# Altium PCB AmpPCB.PcbDoc
Units mil, origin at the board's own origin, x right, y up, seen from the top; angles counter-clockwise.
Board outline 2200 x 1925 mil, 4 copper layers (Top Layer, Int1 (GND), Int2 (PWR), Bottom Layer), stack 53.912 mil thick; 31 components, 20 nets, 89 pads, 26 vias.
Unrouted connection lines stored in the file: 1.
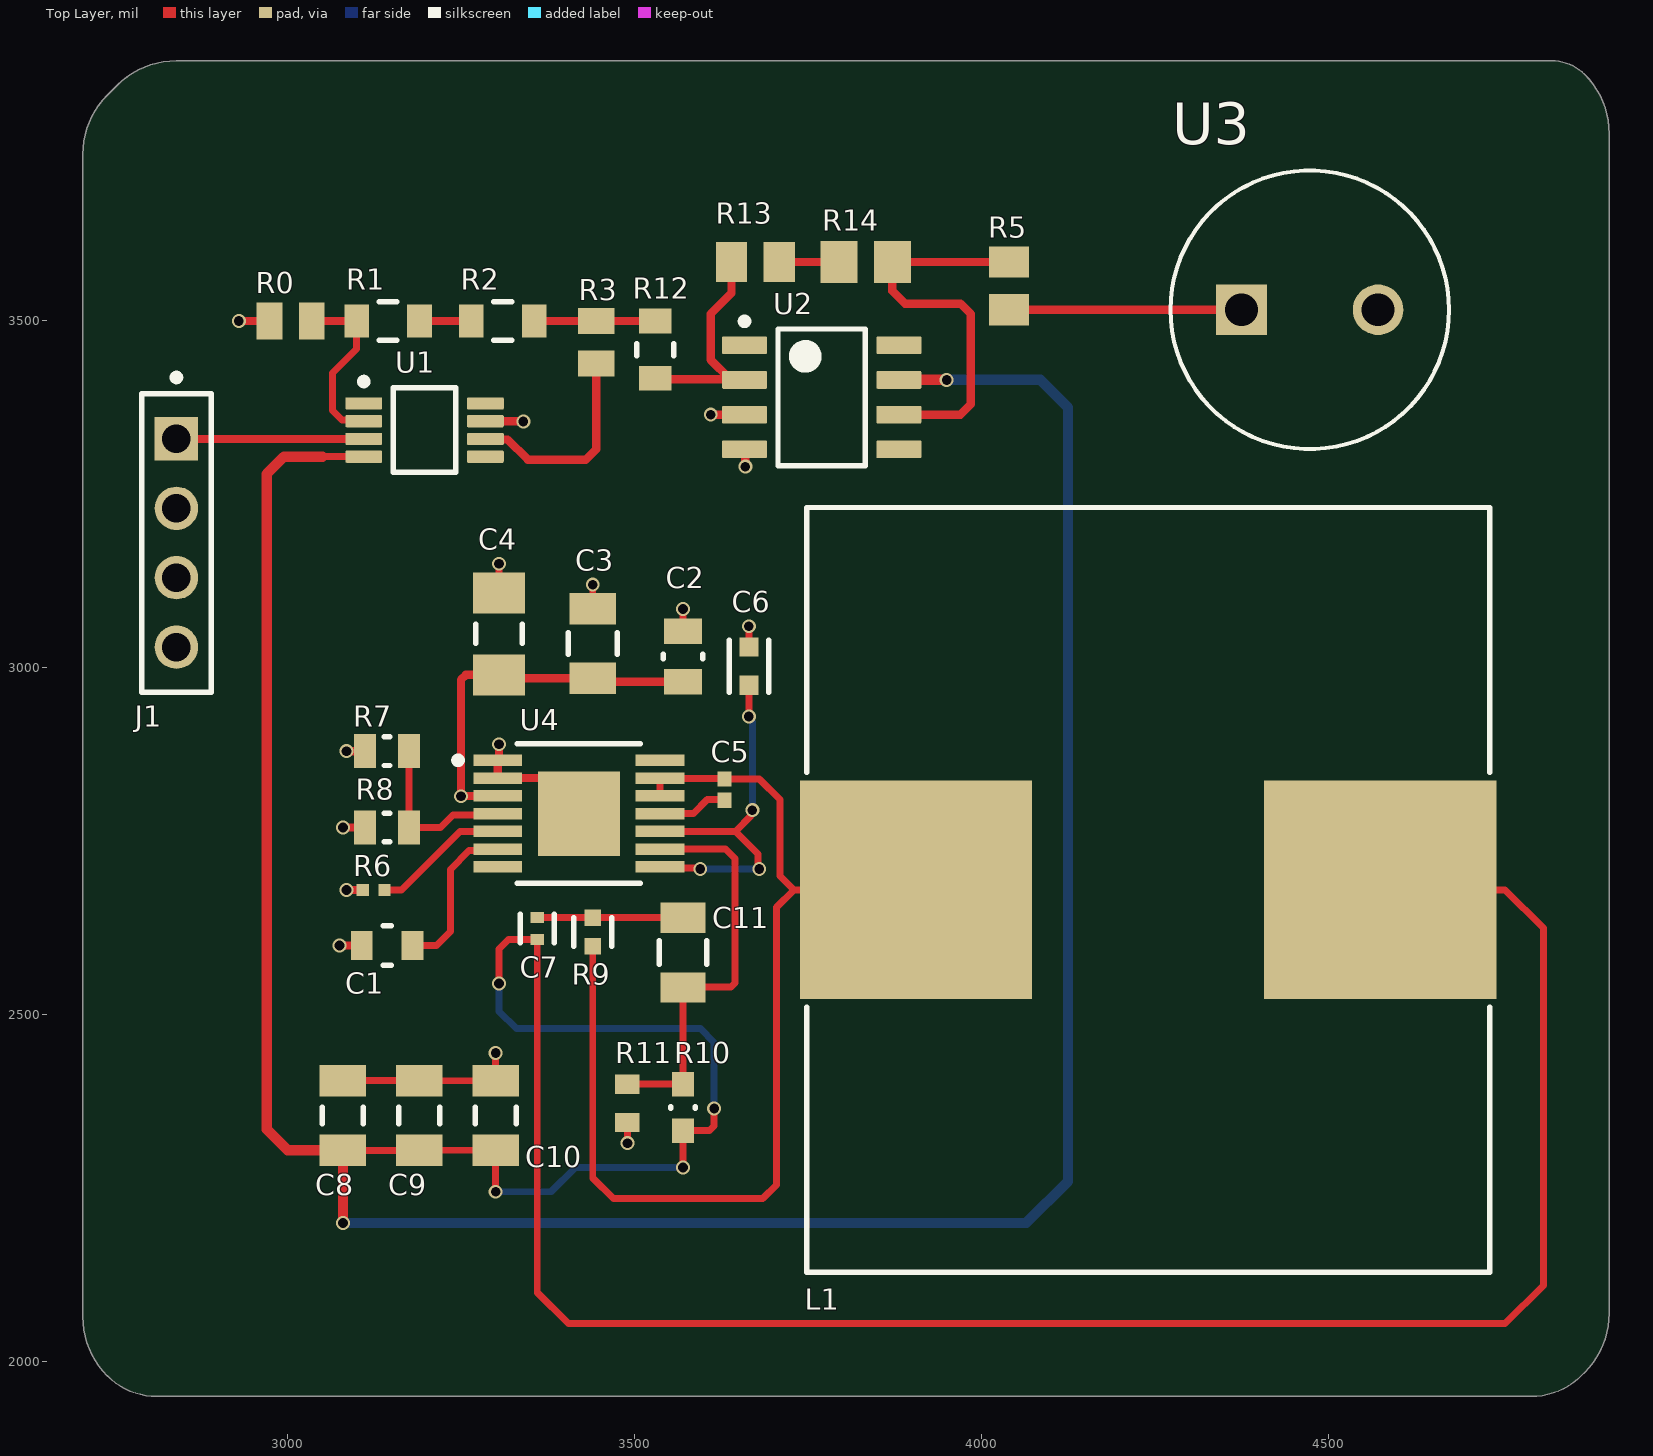
[diagram p0: Top Layer view]
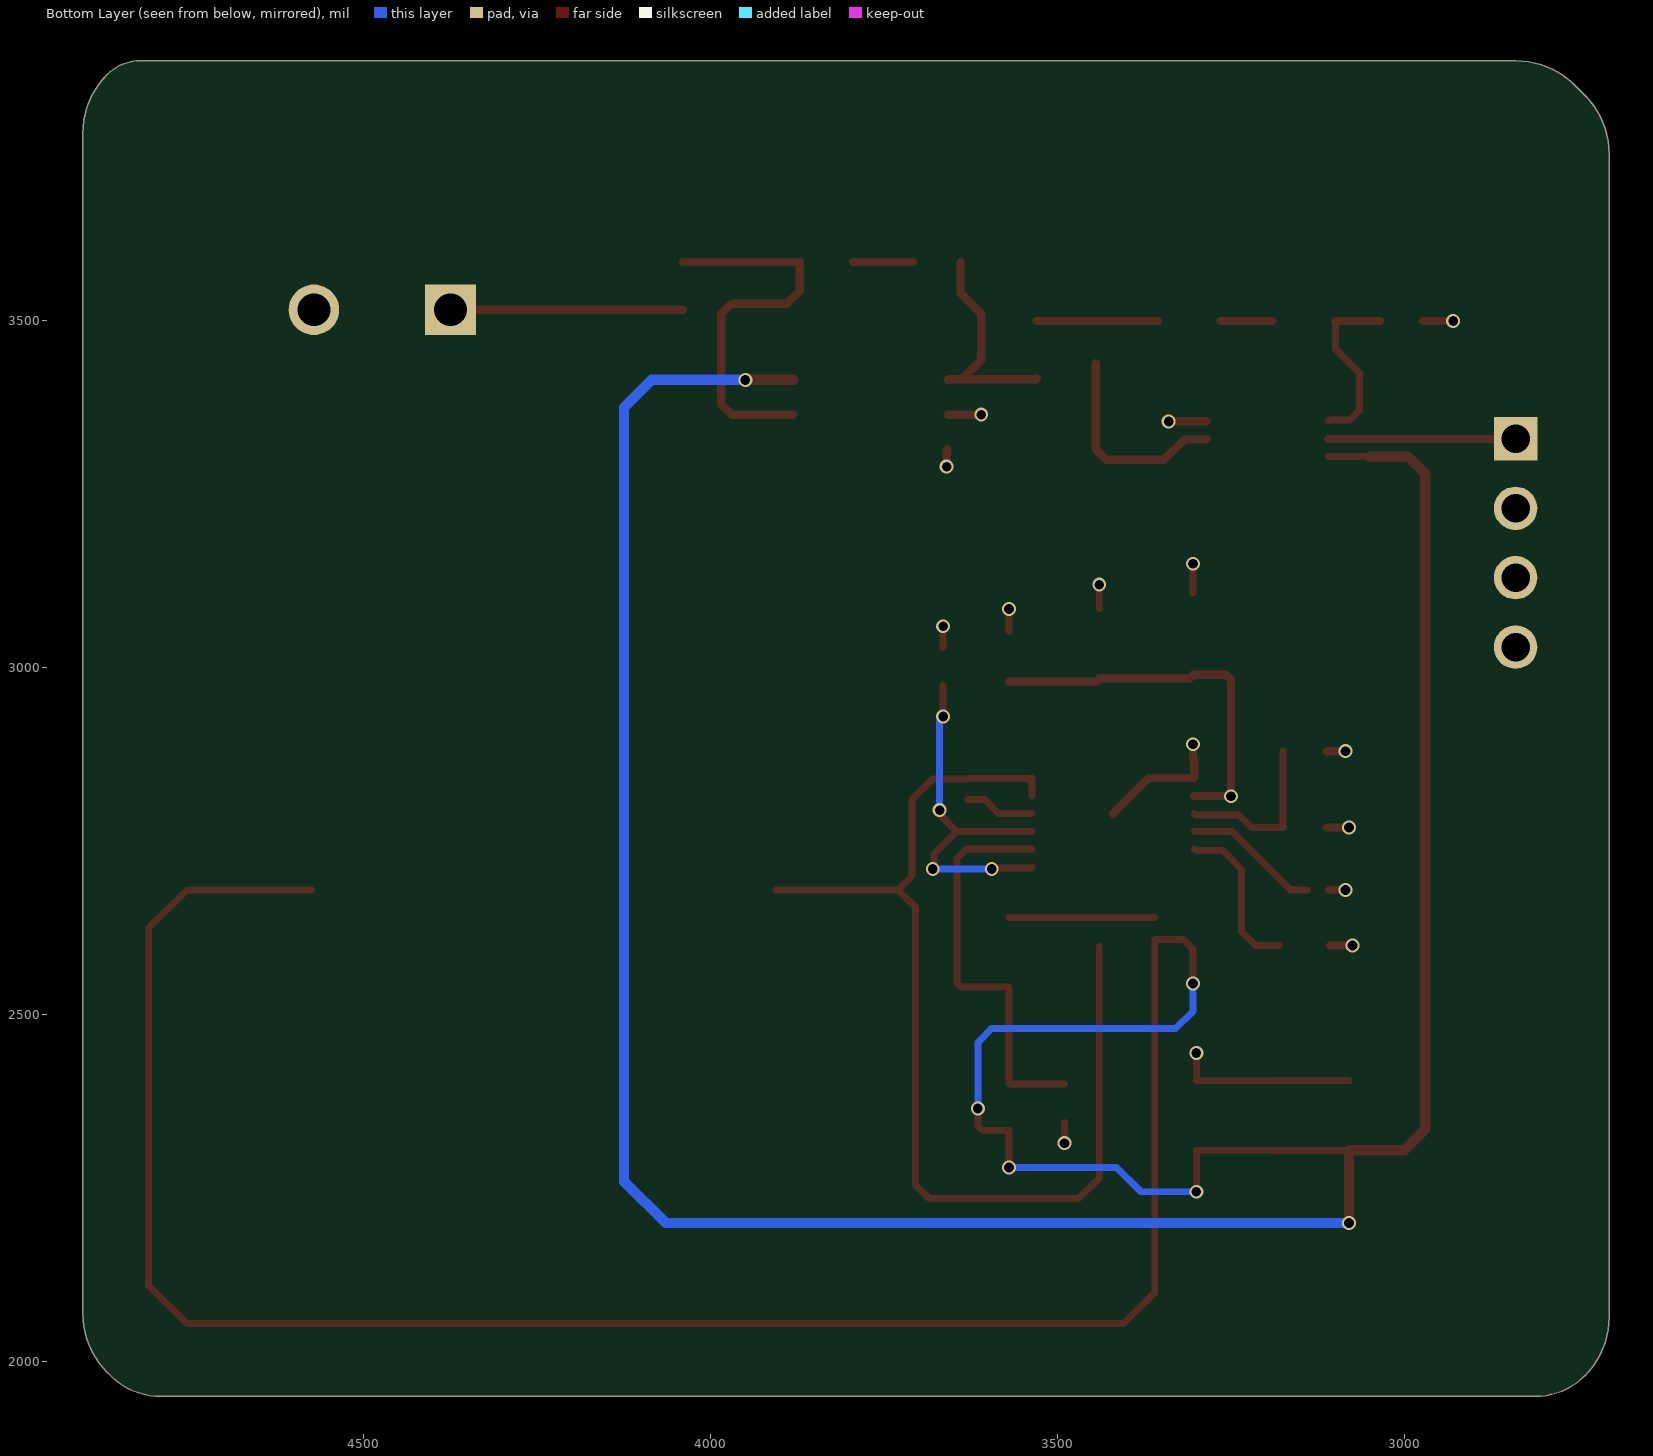
[diagram p1: Bottom Layer view, seen from below]
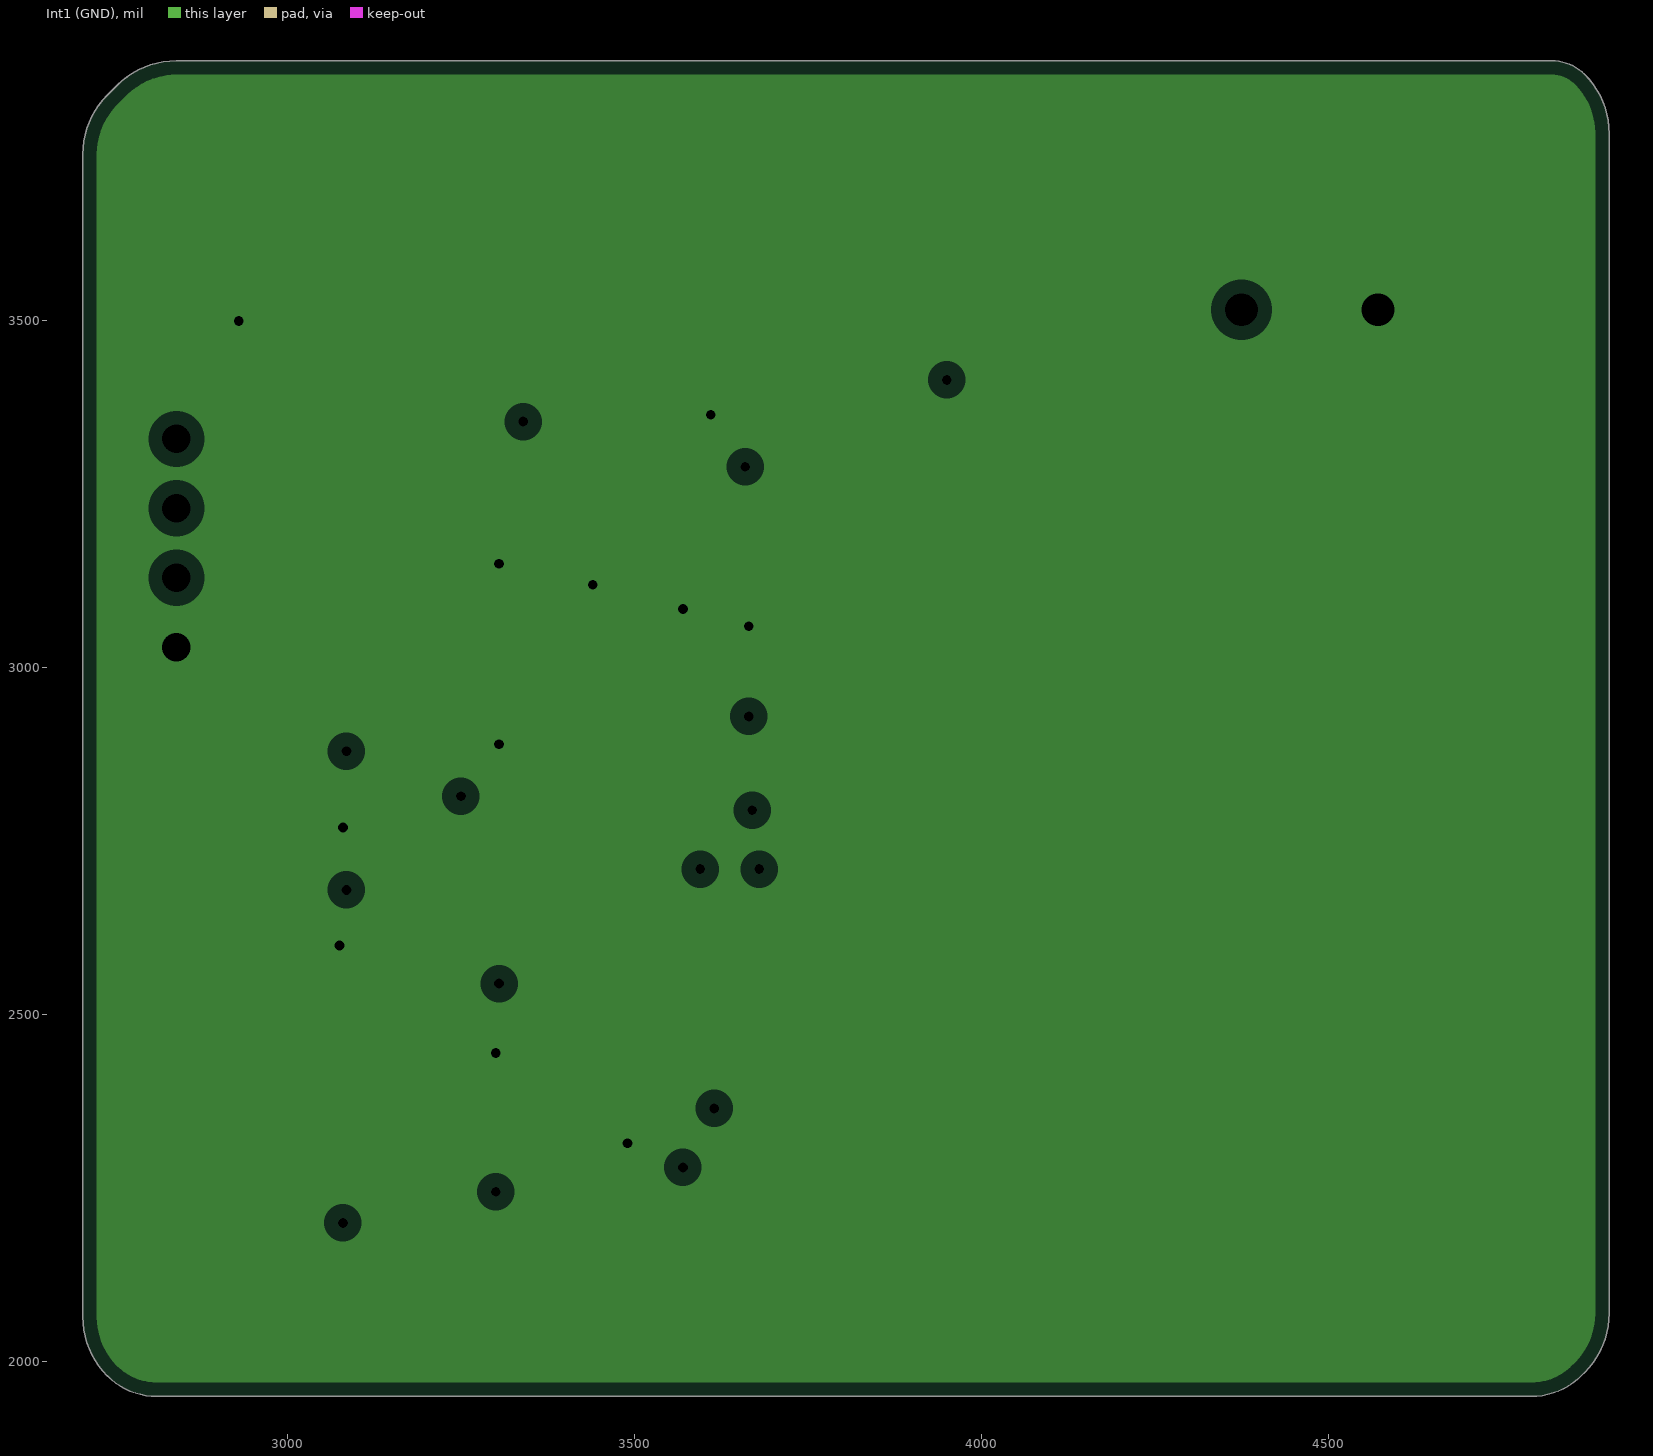
[diagram p2: Int1 (GND), clearances drawn from the general rule]
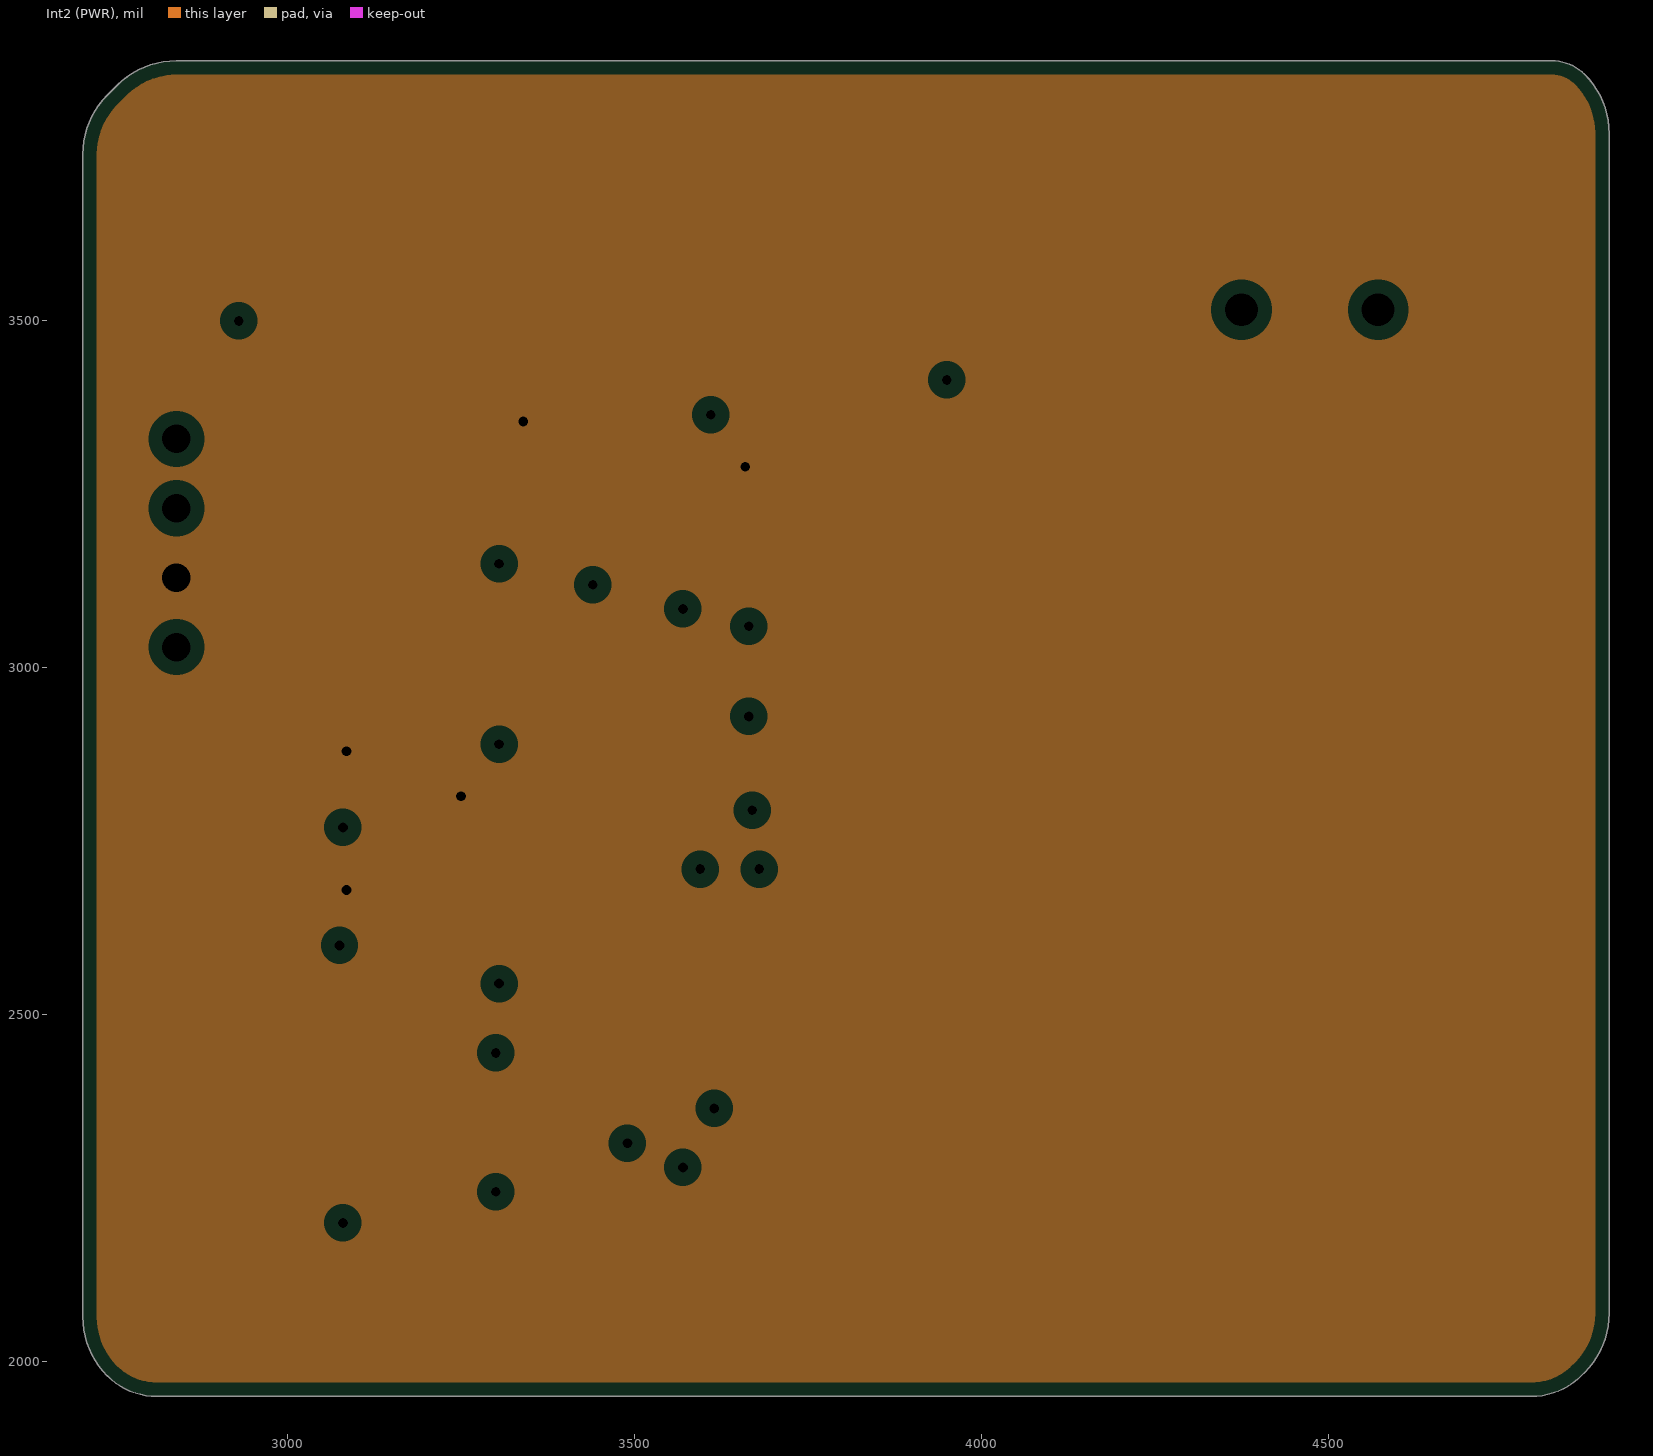
[diagram p3: Int2 (PWR), clearances drawn from the general rule]
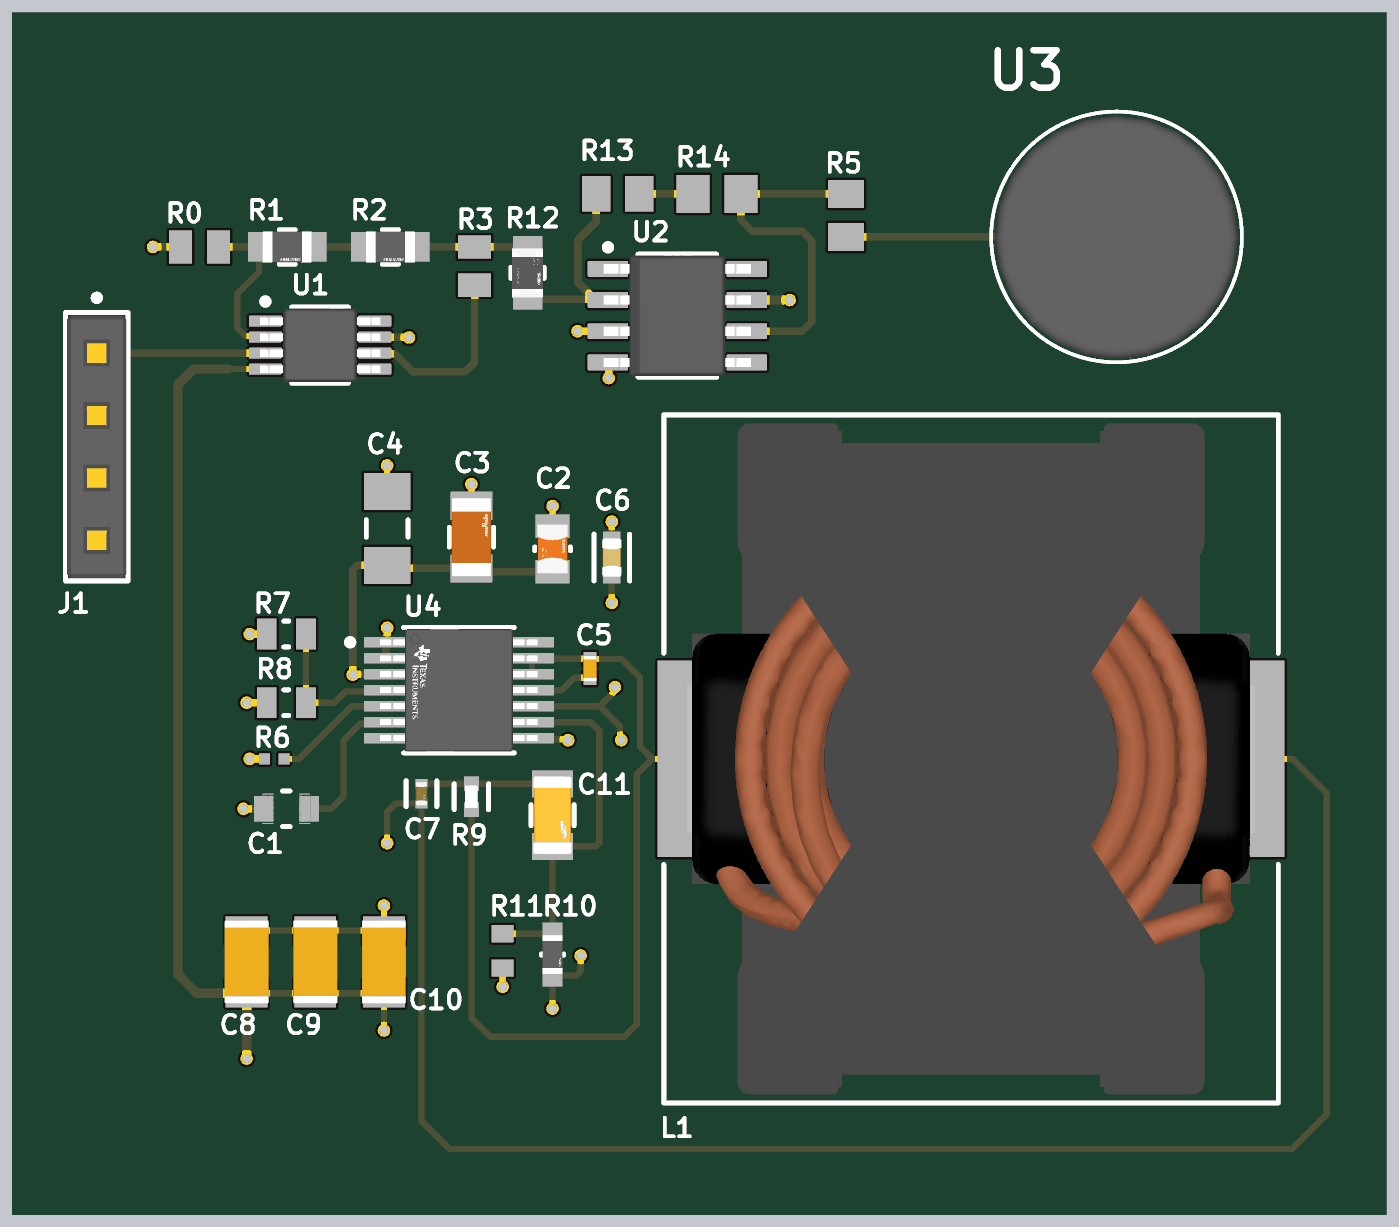
[diagram p4: 3D render of the assembled board from above, using the file's embedded part models]

## Layer stack, top to bottom
Top Solder: solder mask 1, SM-001, Dk 4
Top Layer: signal copper 1.378
Dielectric 1: prepreg 5.1, PP-017, Dk 4.3
Dielectric 2: prepreg 5.1, PP-017, Dk 4.3
Int1 (GND): plane copper 1.378, net GND
Dielectric 3: core 28, Core-039, Dk 4.8
Int2 (PWR): plane copper 1.378, net +5
Dielectric 4: prepreg 5.1, PP-017, Dk 4.3
Dielectric 5: prepreg 5.1, PP-017, Dk 4.3
Bottom Layer: signal copper 1.378
Bottom Solder: solder mask 1, SM-001, Dk 4

## Board outline
2740.36,1979.64 cw(c2825.71,2065) 2705,2065 2705,3275 2705,3730 2705,3740 cw(c2825.71,3740) 2740.36,3825.36 2754.64,3839.64 cw(c2840,3754.29) 2840,3875 2860,3875 4822.22,3875 cw(c4822.22,3807.93) 4869.64,3855.36 cw(c4784.29,3770) 4905,3770 4905,2115 4905,2070 cw(c4784.29,2070) 4869.64,1984.64 4865,1980 cw(c4792.57,2052.43) 4792.57,1950 2811.92,1950 cw(c2811.92,2051.21)

## Design rules (kind name [scope] priority, off if disabled: settings)
Clearance [All] p1: gap=10 ignorepadtopadclearanceinfootprint=FALSE except(5: SMDPad-SMDPad; 12: Arc-Arc Arc-Track Arc-Via Track-Track Track-Via Via-Via; 13: Arc-Hole Track-Hole)
PlaneClearance [All] p1: clearance=20
PlaneConnect [All] p1: planeconnectstyle=Relief reliefexpansion=20 reliefentries=4 reliefconductorwidth=10 reliefairgap=10
PolygonConnect [All] p1: connectstyle=Relief reliefconductorwidth=10 reliefentries=4 polygonreliefangle="90 Angle" airgapwidth=10
RoutingVias [All] p1: holewidth=14 width=20 viastyle="Through Hole" minholewidth=8 minwidth=14 maxholewidth=20 maxwidth=26
SolderMaskExpansion [All] p1: expansion=4 istentingtop=FALSE
Width [All] p1: maxlimit=20 minlimit=10 preferedwidth=15 minimp=50.000000 maximp=50.000000 favimp=50.000000
28 further rules are at their usual default settings.

## Components (designator, comment, footprint, x,y, rotation, side; value= is the part's Value field where it differs from the comment)
C1 "22nF" FP-CGA4J-MFG 3143.58,2600 r180 top
C2 "0.1uF" FP-CC0805-0_85-MFG 3570,3016.42 r90 top value="100 nF"
C3 "4.7uF" FP-GRM31C-0_2-e0_3_0_8-IPC_C 3440,3035.23 r90 top
C4 "1uF" CAPC3216X180X50ML20T25 3305,3049.06 r270 top
C5 "10nF" CAPC1005X55X25LL05T10 3630,2824.65 r90 top
C6 "1uF" FP-CGA3E-0_3-0_1-MFG 3665,3002.56 r90 top
C7 "1nF" FP-CGA2B-MFG 3360,2624.25 r270 top
C8 "10uF" CAPC3216X180X55LL20T25 3080,2354.8 r90 top
C9 "10uF" CAPC3216X180X55LL20T25 3190,2355 r90 top
C10 "10uF" CAPC3216X180X55LL20T25 3300,2354.8 r90 top
C11 "3.3nF" FP-CL31-IPC_C 3570,2589.75 r270 top
J1 "SSW-104-02-G-S" FP-SSW-104-02-G-S-MFG 2840,3180 r270 top
L1 "220nF" WE-HCF_2920 4240.35,2680 r90 top
R0 "1.54K" RESC2013X70X40LL20T20 3004.49,3500 r0 top
R1 "3K" FP-RC2012-MFG 3145,3500 r0 top
R2 "3K" FP-RC2012-MFG 3310.28,3500 r0 top
R3 "50R" RESC2013X70X40LL20T20 3445,3469.49 r90 top
R5 "215" RESC2013X70X40NL20T20 4040,3550.55 r270 top
R6 "294K" RESC1005X40X25LL05T05 3124.25,2680 r180 top
R7 "102K" RESC2013X60X35LL10T20 3143.5,2880 r180 top
R8 "102K" RESC2013X60X35LL10T20 3143.5,2770 r0 top
R9 "340K" FP-CRCW0402-e3-MFG 3440,2619.33 r90 top
R10 "100K" FP-RC0603-0_55-MFG 3570,2366.54 r270 top
R11 "62K" RESC1608X55X25NL10T15 3490,2372.44 r90 top
R12 "20K" FP-RT0805-MFG 3530,3458.66 r270 top value=20KΩ
R13 "13K" RESC2013X70X40NL20T20 3674.45,3585 r0 top
R14 "1K" RESC2013X70X40ML20T20 3833.39,3585 r0 top
U1 "OPA1641AIDGKT" DGK0008A_N 3197.6,3342.8 r0 top
U2 "TL071CDR" D0008A_M 3770,3390 r0 top
U3 "MA40S4S" FP-MA40S4S-MFG 4473.43,3516.1 r0 top
U4 "LM5161PWPR" FP-PWP0014A-MFG 3420,2790 r0 top

## Footprints (in the part's own frame and the unit in brackets; to place one, negate y for a bottom-side part, rotate by r counter-clockwise, add the part's x,y. Pads: shape width x height; smd on the part's side, far side on the other; paste and mask are expansions set on the pad)
CAPC1005X55X25LL05T10 [mm] "Chip Capacitor, 2-Leads, Body 1.05x0.55mm, IPC High Density"
  rect 0.56x0.52 smd: 1(-0.39,0) 2(0.39,0)
  body extent -0.53,-0.28 0.53,0.28, height 0.55
CAPC3216X180X50ML20T25 [mm] "Chip Capacitor, 2-Leads, Body 3.40x1.80mm, IPC Low Density"
  rect 1.5x1.9 smd: 1(-1.5,0) 2(1.5,0)
  silkscreen extent -0.35,-0.85 0.35,0.85, body extent -1.7,-0.9 1.7,0.9, height 1.8
CAPC3216X180X55LL20T25 [mm] "Chip Capacitor, 2-Leads, Body 3.4x1.8mm, IPC High Density"
  rect 1.15x1.7 smd: 1(-1.275,0) 2(1.275,0)
  silkscreen extent -0.3,-0.75 0.3,0.75, body extent -1.7,-0.9 1.7,0.9, height 1.8
D0008A_M [mm] "SOIC, 8-Leads, Body 5x4mm, Pitch 1.27mm, IPC Low Density"
  rrect15% 1.65x0.65 smd: 1(-2.825,1.905) 2(-2.825,0.635) 3(-2.825,-0.635) 4(-2.825,-1.905) 5(2.825,-1.905) 6(2.825,-0.635) 7(2.825,0.635) 8(2.825,1.905)
  silkscreen extent -2.95,-2.5 1.6,2.9, body extent -3,-2.45 3,2.45, height 1.63
DGK0008A_N [mm] "TSOP, 8-Leads, Body 3.1x3.1mm, Pitch 0.65mm, IPC Medium Density"
  rrect22% 1.35x0.45 smd: 1(-2.225,0.975) 2(-2.225,0.325) 3(-2.225,-0.325) 4(-2.225,-0.975) 5(2.225,-0.975) 6(2.225,-0.325) 7(2.225,0.325) 8(2.225,0.975)
  silkscreen extent -2.35,-1.55 1.15,1.9, body extent -2.45,-1.5 2.45,1.5, height 0.94
FP-CC0805-0_85-MFG [mm]
  rect 0.95x1.4 smd paste+0 mask+0: 1(-0.925,0) 2(0.925,0)
  silkscreen extent -0.08,-0.72 0.08,0.72, body extent -1.6,-1.05 1.6,1.05, height 0.25
FP-CGA2B-MFG [mm]
  rect 0.4x0.5 smd paste+0 mask+0: 1(-0.4,0) 2(0.4,0)
  silkscreen extent -0.53,-0.63 0.53,0.63, body extent -0.7,-0.38 0.7,0.38, height 0.25
FP-CGA3E-0_3-0_1-MFG [mm]
  rect 0.7x0.7 smd paste+0 mask+0: 1(-0.7,0) 2(0.7,0)
  silkscreen extent -0.95,-0.72 0.95,0.72, body extent -1.15,-0.65 1.15,0.65, height 0.25
FP-CGA4J-MFG [mm]
  rect 0.8x1.05 smd paste+0 mask+0: 1(-0.925,0) 2(0.925,0)
  silkscreen extent -0.15,-0.72 0.15,0.72, body extent -1.43,-0.82 1.43,0.82, height 0.25
FP-CL31-IPC_C [mil]
  rect 43.52x65.28 smd paste+0 mask+0: 1(-50.25,0) 2(50.25,0)
  silkscreen extent -17,-34 17,34, body extent -76,-38 76,38, height 10
FP-CRCW0402-e3-MFG [mm]
  rect 0.6x0.6 smd paste+0 mask+0: 1(-0.525,0) 2(0.525,0)
  silkscreen extent -0.53,-0.7 0.53,0.7, body extent -0.92,-0.4 0.92,0.4, height 0.25
FP-GRM31C-0_2-e0_3_0_8-IPC_C [mil]
  rect 45.46x67.17 smd paste+0 mask+0: 1(-50.23,0) 2(50.23,0)
  silkscreen extent -16,-35 16,35, body extent -77,-39 77,39, height 10
FP-MA40S4S-MFG [mm]
  rect 1.85x1.85 hole 1.2 paste-2539.97 mask+0: 1(-2.5,0)
  round 1.85 hole 1.2 paste-2539.97 mask+0: 2(2.5,0)
  silkscreen extent -5.1,-5.1 5.1,5.1, body extent -5.2,-5.2 5.2,5.2, height 0.25
FP-PWP0014A-MFG [mm]
  rect 1.78x0.42 smd paste+0 mask+0: 1(-2.97,1.95) 2(-2.97,1.3) 3(-2.97,0.65) 4(-2.97,0) 5(-2.97,-0.65) 6(-2.97,-1.3) 7(-2.97,-1.95) 8(2.97,-1.95) 9(2.97,-1.3) 10(2.97,-0.65) 11(2.97,0) 12(2.97,0.65) 13(2.97,1.3) 14(2.97,1.95)
  rect 3x3.1 smd paste+0 mask+0: 15(0,0)
  silkscreen extent -4.55,-2.55 2.25,2.55, body extent -3.96,-2.65 3.96,2.65, height 0.25
FP-RC0603-0_55-MFG [mm]
  rect 0.9x0.8 smd paste+0 mask+0: 1(-0.85,0) 2(0.85,0)
  silkscreen extent -0.03,-0.45 0.03,0.45, body extent -1.4,-0.55 1.4,0.55, height 0.25
FP-RC2012-MFG [mm]
  rect 0.9x1.2 smd paste+0 mask+0: 1(-1.15,0) 2(1.15,0)
  silkscreen extent -0.33,-0.7 0.33,0.7, body extent -1.7,-0.8 1.7,0.8, height 0.25
FP-RT0805-MFG [mm]
  rect 0.9x1.2 smd paste+0 mask+0: 1(-1.05,0) 2(1.05,0)
  silkscreen extent -0.23,-0.67 0.23,0.67, body extent -1.6,-0.77 1.6,0.77, height 0.25
FP-SSW-104-02-G-S-MFG [mm]
  rect 1.59x1.59 hole 1.04 paste-2539.97 mask+0: 1(-3.81,0)
  round 1.59 hole 1.04 paste-2539.97 mask+0: 2(-1.27,0) 3(1.27,0) 4(3.81,0)
  silkscreen extent -6.18,-1.27 5.46,1.27, body extent -5.56,-1.37 5.56,1.37, height 0.25
RESC1005X40X25LL05T05 [mm] "Chip Resistor, 2-Leads, Body 1.00x0.50mm, IPC High Density"
  rect 0.45x0.45 smd: 1(-0.4,0) 2(0.4,0)
  body extent -0.53,-0.27 0.53,0.28, height 0.4
RESC1608X55X25NL10T15 [mm] "Chip Resistor, 2-Leads, Body 1.60x0.80mm, IPC Medium Density"
  rect 0.7x0.9 smd: 1(-0.7,0) 2(0.7,0)
  body extent -0.85,-0.45 0.85,0.45, height 0.55
RESC2013X60X35LL10T20 [mm] "Chip Resistor, 2-Leads, Body 2.00x1.25mm, IPC High Density"
  rect 0.8x1.25 smd: 1(-0.8,0) 2(0.8,0)
  silkscreen extent -0.1,-0.53 0.1,0.53, body extent -1.05,-0.67 1.05,0.67, height 0.6
RESC2013X70X40LL20T20 [mm] "Chip Resistor, 2-Leads, Body 2.00x1.25mm, IPC High Density"
  rect 0.95x1.35 smd: 1(-0.775,0) 2(0.775,0)
  body extent -1.1,-0.72 1.1,0.72, height 0.7
RESC2013X70X40ML20T20 [mm] "Chip Resistor, 2-Leads, Body 2.00x1.25mm, IPC Low Density"
  rect 1.35x1.55 smd: 1(-0.975,0) 2(0.975,0)
  body extent -1.1,-0.72 1.1,0.72, height 0.7
RESC2013X70X40NL20T20 [mm] "Chip Resistor, 2-Leads, Body 2.00x1.25mm, IPC Medium Density"
  rect 1.15x1.45 smd: 1(-0.875,0) 2(0.875,0)
  body extent -1.1,-0.72 1.1,0.72, height 0.7
WE-HCF_2920 [mm] "SMD High Current Inductor, body 28x25mm"
  rect 8x8.5 smd: 1(0,8.5) 2(0,-8.5)
  silkscreen extent -14,-12.5 14,12.5, body extent -13.65,-11.55 13.65,11.55, height 20

## Part data
C1: library part CMP-08246-000753-1, "Cap Ceramic 22nF 50V C0G 5% Pad SMD 0805 +125°C Automotive T/R", Case Code (Imperial)=0805, Case Code (Metric)=2012, Dielectric=C0G, Max Operating Temperature=125°C, Min Operating Temperature=-55°C, Package Quantity=1, Ratings=AEC-Q200, Tolerance=5%, Voltage Rating=50V, Capacitance=22nF, Case/Package=0805, Composition=Ceramic, Depth=1.25mm, Height=1.25mm, Lead Free="Lead Free", Length=2mm, Mount="Surface Mount", Packaging="Tape and Reel", REACH SVHC="No SVHC", Termination=SMD/SMT, Thickness=0.057inch, Voltage Rating (DC)=50V, Weight=0.000194oz, Width=0.049inch
C2: library part CMP-1036-04410-2, "CAP CER 0.1UF 25V X7R 0805", Capacitance="100 nF", Manufacturer=Yageo, Manufacturer Part Number=CC0805KRX7R8BB104, Package=CC0805-0.85, Temperature="-30°C to +85°C", Temperature Characteristic=X7R, Temperature Range High=+85°C, Temperature Range Low=-30°C, Tolerance=0.1, Voltage Rating="25 V", Automotive=No, Category=Cap, ComponentLink2Description=Datasheet, ComponentLink2URL=http://www.yageo.com/documents/recent/UPY-GPHC_Y5V_6.3V-to-50V_8.pdf, Device Class L1="Passive Components", Device Class L2=Capacitors, Device Class L3="Ceramic Capacitors", Digikey Description="CAP CER 0.1UF 25V X7R 0805", Footprint Url=http://www.yageo.com/exep/pages/download/literatures/UPY-C_GEN_24.pdf, Height=0.95mm, Ipc Land Pattern Name=CAPC200125X85, Lead Free=Yes, Material=Ceramic, Mouser Description="Multilayer Ceramic Capacitors MLCC - SMD/SMT 100nF 25V X7R 10%", Octopart=https://octopart.com/cc0805krx7r8bb104-yageo-39467766, RoHS=TRUE
C3: library part CMP-1037-04923-3, "Chip Multilayer Ceramic Capacitors for General Purpose, 1206, 4.7uF, X7R, 15%, 10%, 50V", Case Code (Imperial)=1206, Case Code (Metric)=3216, Dielectric=X7R, Max Operating Temperature=125°C, Min Operating Temperature=-55°C, Package Quantity=2000, Tolerance=10%, Voltage=50V, Capacitance=4.7uF, Case/Package=1206, Depth=1.6mm, Height=1.6mm, Lead Free="Lead Free", Length=3.2mm, Material=Ceramic, Mount="Surface Mount", Packaging="Tape and Reel", Radiation Hardening=No, REACH SVHC="No SVHC", Termination=SMD/SMT, Thickness=0.071inch, Voltage Rating=50V, Voltage Rating (DC)=50V, Width=0.063inch
C4: library part CMP-2000-04991-1, "Chip Capacitor, 1 uF, +/- 10%, 25 V, -55 to 125 degC, 1206 (3216 Metric), RoHS, Tape and Reel", Capacitance - nF=1000nF, Case Code - in=1206, Case Code - mm=3216, Case Height=1.6mm, Case Length=3.2mm, Dielectric=X7R, Manufacturer=Kemet, Maximum Operating Temperature=+125C, Minimum Operating Temperature=-55C, Operating Temperature Range=-55Cto+125C, Package / Case=1206(3216metric), Package Description="2-Pin Surface Mount Device, Body 3.2 x 1.6 mm", Temperature Coefficient / Code=+/-15%, Tolerance=10%, Voltage Rating=25V, Brand=Kemet, Capacitance=1uF, Case Width=1.6mm, Class=Class1, Datasheet URL=https://ciiva.com/datasheet-click-18194173?src=ciiva&sig=6daff8c4, Datasheet Version=Jul-14, Dimensions=1.6mmWx3.2mmLx1.6mmH, Factory Pack Quantity=2000, Manufacturer URL=http://www.kemet.com/, Package Reference=1206, Packaging=Reel, Product=GeneralTypeMLCCs, Product Category=MultilayerCeramicCapacitorsMLCC-SMD/SMT, RoHS=Details, Series=C1206C, Termination Style=SMD/SMT, Type=SMDMLCCX7R6.3-250VDCCommericalGrade, Voltage Rating DC=25V
C5: library part CMP-2000-06332-1, "Chip Capacitor, 10 nF, 16 V, 10%, -55 to 125 degC, 0402 (1005 Metric), RoHS, Tape and Reel", Capacitance=10000pF, Case Size/Dimension=0402, Dielectric=X7R, Manufacturer=Murata, Package Description="2-Pin Surface Mount Device, Body 1 x 0.5 mm", Rated Voltage=16V, Tolerance (%)=±10%, Datasheet URL=http://psearch.en.murata.com/capacitor/product/GRM155R71C103KA01%23.pdf, Datasheet Version=06/2016, Manufacturer URL=http://www.murata.com/, Mounting Technology=SurfaceMount, Package Reference=0402
C6: library part CMP-08246-002551-1, "Cap Ceramic 1uF 35V X7R 10% Pad SMD 0603 +125°C Automotive T/R", Case Code (Imperial)=0603, Case Code (Metric)=1608, Dielectric=X7R, Max Operating Temperature=125°C, Min Operating Temperature=-55°C, Package Quantity=4000, Ratings=AEC-Q200, Tolerance=10%, Voltage Rating=35V, Capacitance=1uF, Case/Package=0603, Height=0.8mm, Length=0.063inch, Mount="Surface Mount", Packaging="Tape and Reel", Termination=SMD/SMT, Thickness=0.035inch, Voltage Rating (DC)=35V, Weight=7.1E-05oz, Width=0.031inch
C7: library part CMP-08246-002303-1, "Cap Ceramic 1nF 50V X7R 10% Pad SMD 0402 +125°C Automotive T/R", Case Code (Imperial)=0402, Case Code (Metric)=1005, Dielectric=X7R, Max Operating Temperature=125°C, Min Operating Temperature=-55°C, Package Quantity=1, Ratings=AEC-Q200, Tolerance=10%, Voltage Rating=50V, Capacitance=1nF, Case/Package=0402, Composition=Ceramic, Depth=0.5mm, Height=0.5mm, Lead Free="Lead Free", Length=1mm, Mount="Surface Mount", Packaging="Tape and Reel", Radiation Hardening=No, REACH SVHC="No SVHC", Termination=SMD/SMT, Thickness=0.022inch, Voltage Rating (DC)=50V, Weight=2.3E-05oz, Width=0.02inch
C8 C9 C10: library part CMP-2000-06352-1, "Chip Capacitor, 10 uF, +/- 10%, 16 V, -55 to 125 degC, 1206 (3216 Metric), RoHS, Tape and Reel", Capacitance=10µF, Manufacturer=Murata, Operating Temperature=-55°C~125°C, Package / Case=1206(3216Metric), Package Description="2-Pin Surface Mount Device, Body 3.2 x 1.6 mm", Package Reference=1206, Ratings=-, Standard Package=1, Temperature Coefficient=X7R, Tolerance=±10%, Voltage - Rated=16V, Applications=GeneralPurpose, Catalog Drawings=GRMSeries_1206_1.6, Category=Capacitors, Datasheet URL=http://search.murata.co.jp/Ceramy/image/img/A01X/G101/ENG/GRM31CR71C106KAC7-01.pdf, Datasheet Version=03/2016, Family=CeramicCapacitors, Featured Product=GA3SafetyRecognizedCapsandHi-CapMLCC, Features=-, Height - Seated (Max)=-, Lead Spacing=-, Lead Style=-, Manufacturer URL=http://www.murata.com/, Mounting Technology=SurfaceMount, Mounting Type=SurfaceMount,MLCC, Online Catalog=GRMSeries, Other Names=490-3911-6, Packaging=Digi-Reel®, Product Training Modules=High-CapMultilayerCeramicCapacitors, Series=GRM, Size / Dimension="0.126\"Lx0.063\"W(3.20mmx1.60mm)", Thickness (Max)="0.071\"(1.80mm)"
C11: library part CMP-13271-001980-1, "Cap Ceramic 3.3nF 50V X7R ±10% SMD 1206 +125°C Embossed T/R", Case Code (Imperial)=1206, Case Code (Metric)=3216, Dielectric=X7R, Max Operating Temperature=125°C, Min Operating Temperature=-55°C, Package Quantity=1, Tolerance=10%, Voltage=50V, Capacitance=3.3nF, Case/Package=1206, Depth=1.6mm, Height=0.85mm, Length=3.2mm, Material=Ceramic, Mount="Surface Mount", Packaging="Tape and Reel", Radiation Hardening=No, Thickness=0.039inch, Voltage Rating=50V, Width=0.063inch
J1: library part CMP-00575-00296407-1, "SSW-104-02-G-S Board to Board & Mezzanine Connectors Tiger Buy Socket Strip with PCB Tails, .100 Pitch", Color=Black, Contact Resistance=10mΩ, Current Rating=4.7A, Manufacturer Lifecycle Status=PRODUCTION, Max Current Rating=6.9A, Max Operating Temperature=125°C, Max Voltage Rating (AC)=550V, Min Operating Temperature=-55°C, Voltage Rating (AC)=465V, Voltage Rating (DC)=655V, Connector Type="Receptacle, Socket", Contact Material="Bronze, Gold, Nickel", Contact Plating=Gold, Depth=2.41mm, Gender=Receptacle, Height=8.64mm, Housing Color=Black, Housing Material=Polymer, Lead Free="Lead Free", Lead Pitch=2.54mm, Length=10.67mm, Lifecycle Status=Production, Mount="Through Hole", NexarPartId=296407, Number of Contacts=4, Number of Positions=4, Number of Rows=1, Orientation=Straight, Packaging=Bulk, Pitch=2.54mm, Radiation Hardening=No, REACH SVHC="No SVHC", RoHS=Compliant, Termination=Solder, Voltage Rating=550V, Width=2.41mm
L1: library part CMP-03913-88969860-2, "74437529203221 WE-HCF High Current Inductor, 220uH, 8.8A, 2.8MHz, 36.45mOhm", Ambient Temperature Range High=75°C, Ambient Temperature Range Low=-40°C, DC Resistance (DCR)=36.45mΩ, Inductance=220µH, Inductance Tolerance=20%, Max Operating Temperature=125°C, Saturation Current=4.1A, Height=20.5mm, Length=25mm, Min Operating Temperature=-40°C, NexarPartId=88969860, RoHS=Compliant, Width=28mm
R0: library part CMP-2001-04443-1, Manufacturer=Panasonic, Part Number=ERJ-6ENF1541V
R1 R2: library part CMP-13261-005524-1, "Res Thick Film 0805 3kΩ 1% 0.125W ±100ppm/°C Molded SMD T/R", Case Code (Imperial)=0805, Case Code (Metric)=2012, Max Operating Temperature=155°C, Max Power Dissipation=125mW, Min Operating Temperature=-55°C, Resistance=3kR, Temperature Coefficient=100ppm/°C, Tolerance=1%, Voltage Rating (DC)=150V, Case/Package=0805, Composition="Thick Film", Contact Plating=Tin, Depth=1.25mm, Features="Moisture Resistant", Height=0.024inch, Lead Free="Lead Free", Length=0.079inch, Military Standard=Not, Number of Terminations=2, Packaging="Tape and Reel", Radiation Hardening=No, Width=0.049inch
R3: library part CMP-2001-00425-1, Manufacturer=Panasonic, Part Number=ERJ-6GEYJ510V
R5: library part CMP-2001-00039-1, Manufacturer=Panasonic, Part Number=ERJ-6ENF2150V
R6: library part CMP-2002-08443-1, Manufacturer="Vishay Dale", Part Number=CRCW0402294KFKED
R7 R8: library part CMP-2001-04571-1, Manufacturer=Yageo, Part Number=RC0805FR-07105KL
R9: library part CMP-2002-08533-2, "RES Thick Film, 340kΩ, 1%, 0.063W, 100ppm/°C, 0402", Case Code (Imperial)=0402, Case Code (Metric)=1005, Max Operating Temperature=155°C, Max Power Dissipation=63mW, Min Operating Temperature=-55°C, Package Quantity=10, Resistance=340kR, Temperature Coefficient=100ppm/°C, Tolerance=1%, Voltage Rating=50V, Case/Package=0402, Composition="Thick Film", Contact Plating=Tin, Depth=0.5mm, Features="Automotive AEC-Q200", Height=0.35mm, Lead Free="Lead Free", Length=1mm, Military Standard=Not, Number of Pins=2, Number of Terminations=2, Packaging="Tape and Reel", Power Rating=63mW, Radiation Hardening=No, Termination=SMD/SMT, Voltage Rating (DC)=50V, Weight=2.3E-05oz, Width=0.5mm
R10: library part CMP-2100-03662-2, "RES SMD 100K OHM 1% 1/10W 0603", Case Code (Imperial)=0603, Case Code (Metric)=1608, Max Operating Temperature=155°C, Max Power Dissipation=100mW, Min Operating Temperature=-55°C, Resistance=100kR, Resistance Tolerance=1%, Resistor Type="Thick Film", Temperature Coefficient=100ppm/°C, Voltage Rating=50V, Working Voltage=75V, Case/Package=0603, Construction=Rectangular, Depth=0.8mm, Features="Moisture Resistant", Height=0.45mm, Lead Free="Lead Free", Length=1.6mm, Military Standard=Not, Number of Pins=2, Number of Terminations=2, Packaging="Tape and Reel", Power Rating=100mW, REACH SVHC="No SVHC", RoHS Compliant=Yes, Series=RC, Technology="THICK FILM", Termination=SMD/SMT, Tolerance=1%, Voltage Rating (DC)=50V, Width=0.8mm
R11: library part CMP-2000-04104-1, Manufacturer=Yageo, Part Number=RC0603FR-0762KL
R12: library part CMP-2001-01463-2, "RES SMD 20K OHM 1% 1/8W 0805", Manufacturer=Yageo, Manufacturer Part Number=RT0805FRE0720KL, Package=RT0805, Power Rating=0.125W, Resistance=20KΩ, Temperature="-55°C to +155°C", Temperature Coefficient="50 ppm/°C", Temperature Range High=+155°C, Temperature Range Low=-55°C, Tolerance=0.0001, Voltage Rating=150V, Automotive=No, Category=Res, ComponentLink2Description=Datasheet, ComponentLink2URL=http://www.yageo.com/documents/recent/PYu-RT_1-to-0.01_RoHS_L_9.pdf, Composition="Thin Film", Device Class L1="Passive Components", Device Class L2=Resistors, Device Class L3="Chip SMD Resistors", Digikey Description="RES SMD 20K OHM 1% 1/8W 0805", Footprint Url=http://www.yageo.com/exep/pages/download/literatures/PYu-R_Mount_10.pdf, Height=0.6mm, Ipc Land Pattern Name=RESC200125X50, Lead Free=Yes, Mouser Description="Thin Film Resistors - SMD 1/8W 20K ohm 1% 50ppm", Octopart=https://octopart.com/rt0805fre0720kl-yageo-1410620, RoHS=TRUE, Series=RT
R13: library part CMP-2001-04416-1, Manufacturer=Panasonic, Part Number=ERJ-6ENF1302V
R14: library part CMP-2001-04375-5, "Chip Resistor, 1 KOhm, +/- 1%, 0.125 W, -55 to 155 degC, 0805 (2012 Metric), RoHS, Tape and Reel", Manufacturer=Panasonic, Max Operating Temperature="155 degC", Min Operating Temperature="-55 degC", Package Quantity=1, Voltage Rating="150 V", ComponentLink1Description="Manufacturer URL", ComponentLink1URL=http://www.panasonic.com/, ComponentLink2Description=Datasheet, ComponentLink2URL=http://industrial.panasonic.com/cdbs/www-data/pdf/RDA0000/AOA0000C86.pdf, DatasheetVersion=04/2015, Height="0.6 mm", Length="2 mm", Mount="Surface Mount", Mounting Technology="Surface Mount", PackageDescription="2-Pin Surface Mount Device, Body 2 x 1.25 mm", PackageReference=0805, Packaging="Cut Tape", REACH SVHC=Yes, RoHSCompliant=true
U1: library part CMP-0808-00041-2, "Sound-Plus High-Performance, JFET-Input Audio Operational Amplifier, 4.5 to 36 V, -40 to 85 degC, 8-pin SOP (DGK8), Green (RoHS & no Sb/Br)", Manufacturer="Texas Instruments", Code_JEDEC=MO-187, ComponentLink1Description="Manufacturer URL", ComponentLink1URL=http://www.ti.com/, ComponentLink2Description=Datasheet, ComponentLink2URL=http://www.ti.com/general/docs/lit/getliterature.tsp?genericPartNumber=OPA1641&fileType=pdf, ComponentLink3Description="Package Specification", ComponentLink3URL=http://www.ti.com/litv/pdf/mpds028d, DatasheetVersion=SBOS484B, Eco-Plan="Green (RoHS & no Sb/Br)", GBW(Typ)(MHz)=11, Iq per channel(Max)(mA)=2.3, Mounting Technology="Surface Mount", Number of Channels=1, PackageDescription="8-Pin Thin Small Outline, Body 3 x 3 mm, Pitch 0.65 mm", PackageReference=DGK0008A, PackageVersion="4073329/E, 05/2006", PartNumber=OPA1641AIDGKT, SubFamily="Audio Operational Amplifier"
U2: library part CMP-0017-00391-2, "Low-Noise JFET-Input General-Purpose Operational Amplifier, 7 to 36 V, 0 to 70 degC, 8-pin SOIC (D8), Green (RoHS & no Sb/Br)", Manufacturer="Texas Instruments", Rating=Military, Total Supply Voltage(Max)(+5V is 5, +/-5V is 10)=36, Total Supply Voltage(Min)(+5V is 5, +/-5V is 10)=7, CMRR(Min)(dB)=70, Code_JEDEC=MS-012, ComponentLink1Description="Manufacturer URL", ComponentLink1URL=http://www.ti.com/, ComponentLink2Description=Datasheet, ComponentLink2URL=http://www.ti.com/lit/ds/symlink/tl071.pdf, ComponentLink3Description="Package Specification", ComponentLink3URL=http://www.ti.com/litv/pdf/msoi002j, DatasheetVersion=SLOS080J, Eco-Plan="Green (RoHS & no Sb/Br)", GBW(Typ)(MHz)=3, IIB(Max)(pA)=200, Iq per channel(Max)(mA)=2.5, Mounting Technology="Surface Mount", Number of Channels=1, Offset Drift(Typ)(uV/C)=18, PackageDescription="8-Pin Plastic Small Outline, Body 4.9 x 3.9 mm, Pitch 1.27 mm", PackageReference=D0008A, PackageVersion="4040047-3/M, 06/2011", PartNumber=TL071CDR, Slew Rate(Typ)(V/us)=13, Sub Family="General Purpose Amplifier, High Supply Voltage Amplifier (>=30V)", Vio (25C)(Max)(mV)=10, Vn at 1kHz(Typ)(nV/rtHz)=18
U3: library part CMP-06153-000002-1, "ULTRASONIC SENSOR TRANS 40KHZ", Capacitance=2.55nF, Frequency=40kHz, Max Operating Temperature=85°C, Min Operating Temperature=-40°C, Operating Supply Voltage=20V, Package Quantity=100, Diameter=10mm, Height=7.1mm, Lead Free="Lead Free", Length=7.1mm, Mount=PCB, Number of Pins=2, Outside Diameter=9.9mm, Radiation Hardening=No, REACH SVHC="No SVHC", Self Resonant Frequency=40kHz, Switching Frequency=40kHz, Termination=PCB, Voltage Rating=20V, Voltage Rating (DC)=20V
U4: library part CMP-04918-000082-1, "IC REG BCK FLYBCK ADJ 14HTSSOP", Manufacturer="Texas Instruments", Max Junction Temp=+125°C, Max Supply Voltage=100V, Min Supply Voltage=4.5V, Nominal Supply Current=2.3mA, Output Current=1A, Output Voltage=2-92V, Package=PWP0014A, Switching Frequency=1MHz, Temperature="-40°C to +125°C", Temperature Range Low=-40°C, Automotive=No, Category=IC, ComponentLink2Description=Datasheet, ComponentLink2URL=http://www.ti.com/lit/ds/symlink/lm5161.pdf, Device Class L1="Integrated Circuits (ICs)", Device Class L2="Power Management ICs", Device Class L3="Voltage Regulators - Switching", Digikey Description="IC REG BCK FLYBCK ADJ 14HTSSOP", Height=1.1mm, Ipc Land Pattern Name=SOP65P640X110-14, Lead Free=Yes, Manufacturer Part Number=LM5161PWPR, Mouser Description="Wide Input 4.5-V to 100-V, 1-A Synchronous Buck / Fly-Buck Converter 14-HTSSOP -40 to 125", Number Of Outputs=1, Octopart=https://octopart.com/lm5161pwpr-texas+instruments-71776617, Output Type=AdjustableProgrammable, RoHS=TRUE, Standoff Height=0.05mm, Switching Topology=Buck,Flyback, Temperature Range High=+125°C

## Via types
v1: diameter 20, hole 14, Top Layer to Bottom Layer, 26 vias

## Nets (pads, with @x,y where several pads share a name; then routed paths per layer and width w, separated by ;. In a path a pad name is that pad's centre, name@x,y a point inside that pad or via, vN(x,y) a via of type N, cw(c..) or ccw(c..) an arc to the next point about the centre after c; other vN are vias at no path point)
+5: C2.1 C3.1 C4.2 J1.3 R6.2 R7.2 U1.7 U2.4 U4.3 | length 679.4
  Top Layer w12: v1(3085,2680) R6.2 ; v1(3085,2880) R7.2 ; U1.7 3285.49,3355.3 3339.7,3355.3 v1(3340,3355) ; U4.3 3302.78,2815.3 3250.3,2815.3 v1(3250,2815) 3250,2982.97 3257.03,2990 C4.2 3310,2985 C3.1 3445,2980 C2.1 ; U2.4 3660,3313.78 v1(3660,3290)
-5: C7.2 C8.1 C9.1 C10.1 L1.2 R10.2 U1.4 U2.7 | length 7804.4
  Top Layer w10: 3050,3304.5 3050.09,3304.41 U1.4 ; C8.1 3189.8,2304.61 C9.1 3299.8,2304.8 C10.1 v1(3300,2245) ; v1(3305,2545) 3305,2595 3318.5,2608.5 C7.2 3360,2100 3405,2055 4755,2055 4810,2110 4810,2625 4755,2680 L1.2 ; v1(3570,2280) R10.2 3608.07,2333.07 3615,2340 v1(3615,2365)
  Top Layer w15: 3050,3304.5 2995,3304.5 2970,3279.5 2970,2335 3000.39,2304.61 C8.1 v1(3080,2200) ; U2.7 v1(3950,3415)
  Bottom Layer w10: v1(3300,2245) 3380,2245 3415,2280 v1(3570,2280) ; v1(3305,2545) 3305,2505 3330,2480 3595,2480 3615,2460 v1(3615,2365)
  Bottom Layer w15: v1(3080,2200) 4065,2200 4125,2260 4125,3375 4085,3415 v1(3950,3415)
Amp_Out: R2.2 R3.2 R12.1 | length 174.4
  Top Layer w12: R2.2 R3.2 R12.1
Final_Signal: R5.2 U3.1 | length 335
  Top Layer w12: R5.2 U3.1
GND: C1.2 C2.2 C3.2 C4.1 C6.2 C8.2 C9.2 C10.2 J1.4 R0.1 R8.1 R11.1 U2.3 U3.2 U4.1 U4.2 U4.15 | length 773.2
  Top Layer w10: C8.2 3080.2,2405.2 C9.2 3190.2,2405 C10.2 v1(3300,2445) ; C4.1 v1(3305,3150) ; C3.2 v1(3440,3120) ; v1(3490,2315) R11.1 ; C2.2 v1(3570,3085) ; C6.2 v1(3665,3060)
  Top Layer w12: v1(2930,3500) R0.1 ; v1(3075,2600) C1.2 ; v1(3080,2770) R8.1 ; v1(3305,2890) 3305,2868.7 U4.1 U4.2 3368.82,2841.18 U4.15 ; v1(3610,3365) U2.3
NetC1_1: C1.1 U4.6 | length 233.1
  Top Layer w10: C1.1 3215,2600 3235,2620 3235,2709.68 3261.82,2736.5 3300.75,2736.5 U4.6
NetC5_1: C5.1 U4.11 | length 101.6
  Top Layer w10: U4.11 3585,2790 3605,2810 3629.29,2810 C5.1
NetC5_2: C5.2 L1.1 R9.1 U4.12 U4.13 | length 1580.3
  Top Layer w10: R9.1 3440,2265 3470,2235 3685,2235 3705,2255 3705,2655 3730,2680 ; U4.12 U4.13 3537.52,2840.59 3629.41,2840.59 C5.2 3680,2840 3710,2810 3710,2700 3730,2680 ; L1.1 3730,2680
NetC6_1: C6.1 U4.8 U4.10 | length 544.5
  Top Layer w10: U4.8 3538.54,2711.61 3593.39,2711.61 v1(3595,2710) ; U4.10 3645.59,2764.41 ; v1(3665,2930) C6.1 ; v1(3670,2795) 3668.09,2793.09 3668.09,2786.91 3645.59,2764.41 ; v1(3680,2710) 3678.09,2711.91 3678.09,2731.91 3645.59,2764.41
  Bottom Layer w10: v1(3595,2710) v1(3680,2710) ; v1(3665,2930) 3665,2927.29 3670,2922.29 v1(3670,2795)
NetC7_1: C7.1 C11.1 R9.2 | length 210
  Top Layer w10: C7.1 R9.2 C11.1
NetC11_2: C11.2 R10.1 R11.2 U4.9 | length 590.1
  Top Layer w10: R11.2 R10.1 C11.2 3570.5,2540 3639.14,2540 3645,2545.86 3645,2725 3631.18,2738.82 U4.9
NetR0_2: R0.2 R1.1 U1.2 | length 259.7
  Top Layer w10: R1.1 3099.72,3459.72 3065,3425 3065,3370.68 3078.35,3357.32 3108.27,3357.32 U1.2
  Top Layer w12: R0.2 R1.1
NetR1_2: R1.2 R2.1 | length 74.7
  Top Layer w12: R1.2 R2.1
NetR3_1: R3.1 U1.6 | length 302.4
  Top Layer w12: U1.6 3285.93,3329.27 3317.26,3329.27 3346.53,3300 3430,3300 3445,3315 R3.1
NetR5_1: R5.1 R14.2 U2.6 | length 577
  Top Layer w12: U2.6 3970,3365 3985,3380 3985,3510 3970,3525 3890,3525 3871.77,3543.23 R14.2 R5.1
NetR6_1: R6.1 U4.5 | length 198
  Top Layer w10: R6.1 3164.31,2680 3248.72,2764.41 U4.5
NetR7_1: R7.1 R8.2 U4.4 | length 246.4
  Top Layer w10: R7.1 R8.2 3220.55,2770 3238.55,2788 3301.07,2788 U4.4
NetR12_2: R12.2 R13.1 U2.2 | length 322.6
  Top Layer w12: R12.2 3531.16,3416.16 U2.2@3637.93,3416.16 ; R13.1 3640,3540 3610,3510 3610,3444.09 U2.2@3637.93,3416.16 ; U2.2 3657.62,3416.16 U2.2@3637.93,3416.16
NetR13_2: R13.2 R14.1 | length 86.1
  Top Layer w12: R13.2 R14.1
SIGNAL: J1.1 U1.3 | length 270
  Top Layer w12: J1.1 U1.3
pads on no net: J1.2 U1.1 U1.5 U1.8 U2.1 U2.5 U2.8 U4.7 U4.14

## Polygon pours and split planes (outlines as drawn)
GND on Int1 (GND) (split plane): 2840,3854.9 2860,3854.9 4822.22,3854.9 4822.68,3854.95 4827.49,3854.68 4832.69,3853.79 4837.76,3852.33 4842.63,3850.32 4847.25,3847.76 4851.55,3844.71 4855.14,3841.5 4855.43,3841.14 4855.94,3840.73 4861.44,3834.73 4866.78,3827.76 4871.5,3820.35 4875.56,3812.56 4878.92,3804.44 4881.56,3796.06 4883.47,3787.49 4884.61,3778.78 4884.97,3770.65 4884.9,3770 4884.9,2115 4884.9,2070 4884.97,2069.35 4884.61,2061.22 4883.47,2052.51 4881.56,2043.94 4878.92,2035.56 4875.56,2027.44 4871.5,2019.65 4866.78,2012.24 4861.44,2005.27 4855.94,1999.27 4855.43,1998.86 4850.79,1994.21 4850.37,1993.7 4844.86,1988.71 4838.37,1983.89 4831.43,1979.73 4824.12,1976.28 4816.5,1973.55 4808.65,1971.58 4800.65,1970.4 4793.22,1970.03 4792.57,1970.1 2811.92,1970.1 2811.28,1970.03 2803.96,1970.39 2796.08,1971.56 2788.35,1973.5 2780.85,1976.18 2773.64,1979.59 2766.81,1983.69 2760.4,1988.44 2754.97,1993.36 2754.57,1993.86 2754.06,1994.27 2748.56,2000.27 2743.22,2007.24 2738.5,2014.65 2734.44,2022.44 2731.08,2030.56 2728.44,2038.94 2726.53,2047.51 2725.39,2056.22 2725.03,2064.35 2725.1,2065 2725.1,3275 2725.1,3730 2725.1,3740 2725.03,3740.65 2725.39,3748.78 2726.53,3757.49 2728.44,3766.06 2731.08,3774.44 2734.44,3782.56 2738.5,3790.35 2743.22,3797.76 2748.56,3804.73 2754.06,3810.73 2754.57,3811.14 2768.86,3825.43 2769.27,3825.94 2775.27,3831.43 2782.24,3836.78 2789.65,3841.5 2797.44,3845.56 2805.56,3848.92 2813.93,3851.56 2822.51,3853.47 2831.22,3854.61 2839.35,3854.97
+5 on Int2 (PWR) (split plane): 2840,3854.9 2860,3854.9 4822.22,3854.9 4822.68,3854.95 4827.49,3854.68 4832.69,3853.79 4837.76,3852.33 4842.63,3850.32 4847.25,3847.76 4851.55,3844.71 4855.14,3841.5 4855.43,3841.14 4855.94,3840.73 4861.44,3834.73 4866.78,3827.76 4871.5,3820.35 4875.56,3812.56 4878.92,3804.44 4881.56,3796.06 4883.47,3787.49 4884.61,3778.78 4884.97,3770.65 4884.9,3770 4884.9,2115 4884.9,2070 4884.97,2069.35 4884.61,2061.22 4883.47,2052.51 4881.56,2043.94 4878.92,2035.56 4875.56,2027.44 4871.5,2019.65 4866.78,2012.24 4861.44,2005.27 4855.94,1999.27 4855.43,1998.86 4850.79,1994.21 4850.37,1993.7 4844.86,1988.71 4838.37,1983.89 4831.43,1979.73 4824.12,1976.28 4816.5,1973.55 4808.65,1971.58 4800.65,1970.4 4793.22,1970.03 4792.57,1970.1 2811.92,1970.1 2811.28,1970.03 2803.96,1970.39 2796.08,1971.56 2788.35,1973.5 2780.85,1976.18 2773.64,1979.59 2766.81,1983.69 2760.4,1988.44 2754.97,1993.36 2754.57,1993.86 2754.06,1994.27 2748.56,2000.27 2743.22,2007.24 2738.5,2014.65 2734.44,2022.44 2731.08,2030.56 2728.44,2038.94 2726.53,2047.51 2725.39,2056.22 2725.03,2064.35 2725.1,2065 2725.1,3275 2725.1,3730 2725.1,3740 2725.03,3740.65 2725.39,3748.78 2726.53,3757.49 2728.44,3766.06 2731.08,3774.44 2734.44,3782.56 2738.5,3790.35 2743.22,3797.76 2748.56,3804.73 2754.06,3810.73 2754.57,3811.14 2768.86,3825.43 2769.27,3825.94 2775.27,3831.43 2782.24,3836.78 2789.65,3841.5 2797.44,3845.56 2805.56,3848.92 2813.93,3851.56 2822.51,3853.47 2831.22,3854.61 2839.35,3854.97

## Silkscreen, mask and mechanical layers (free items; w line width, h text height)
Mechanical 1:
  lines w10: 2705,2065 ccw(c2825.71,2065) 2740.36,1979.64 ccw(c2811.92,2051.21) 2811.92,1950 4740,1950 4792.57,1950 ccw(c4792.57,2052.43) 4865,1980 4869.64,1984.64 ccw(c4784.29,2070) 4905,2070 4905,2115 4905,3770 ccw(c4784.29,3770) 4869.64,3855.36 ccw(c4822.22,3807.93) 4822.22,3875 2860,3875 2840,3875 ccw(c2840,3754.29) 2754.64,3839.64 2740.36,3825.36 ccw(c2825.71,3740) 2705,3740 2705,3730 2705,3275 2705,2065